# Altium PCB PCBStudy(LEDLight).PcbDoc
Units mil, origin at the board's own origin, x right, y up, seen from the top; angles counter-clockwise.
Board outline 1400 x 700 mil, 2 copper layers (Top Layer, Bottom Layer); 7 components, 6 nets, 16 pads, 0 vias.
Unrouted connection lines stored in the file: 9.
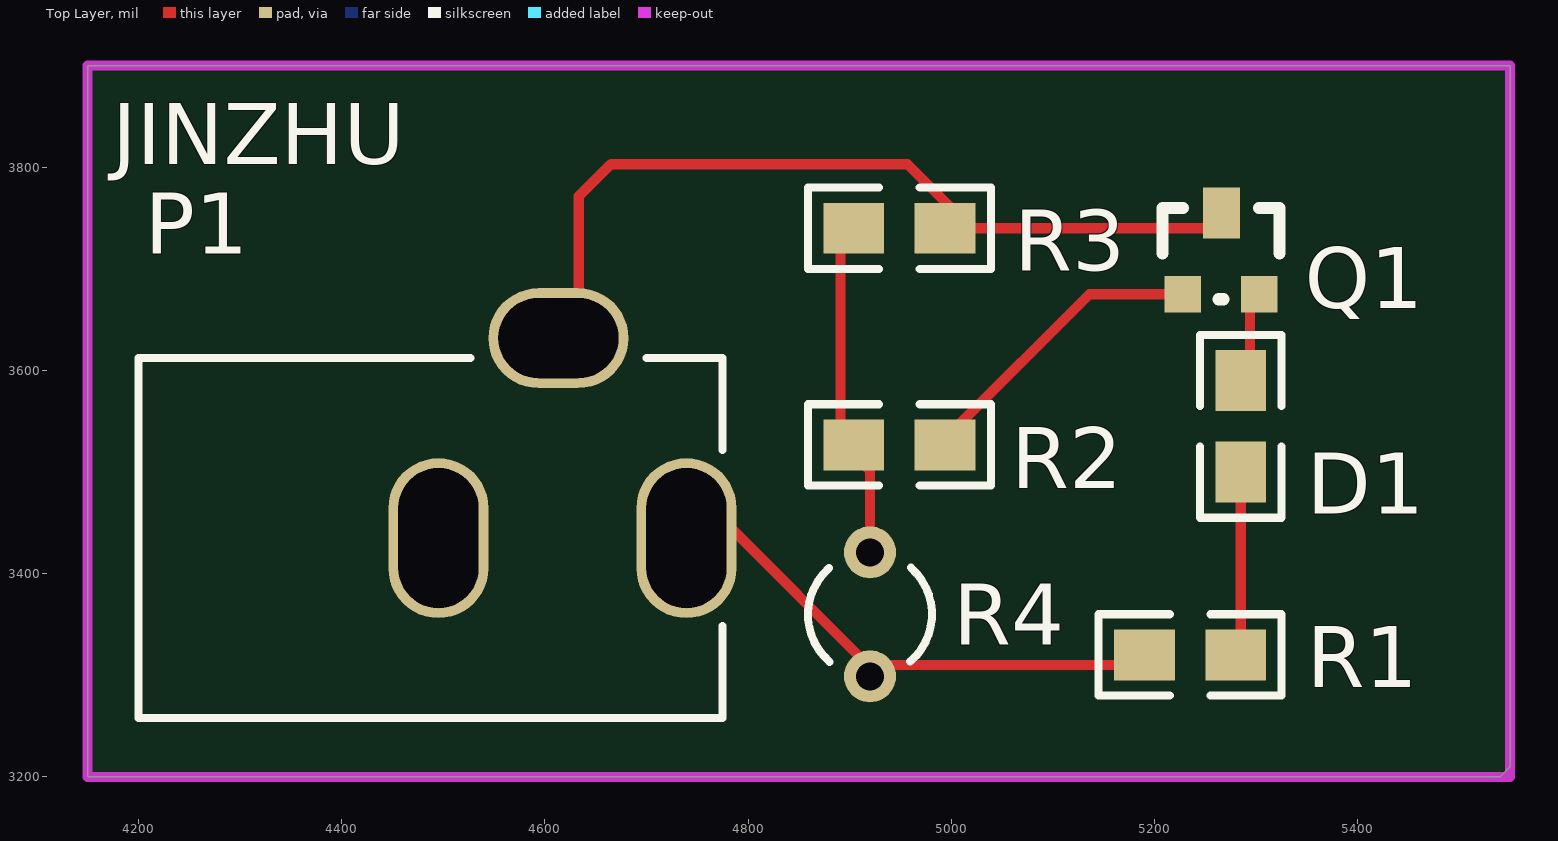
[diagram p0: Top Layer view]
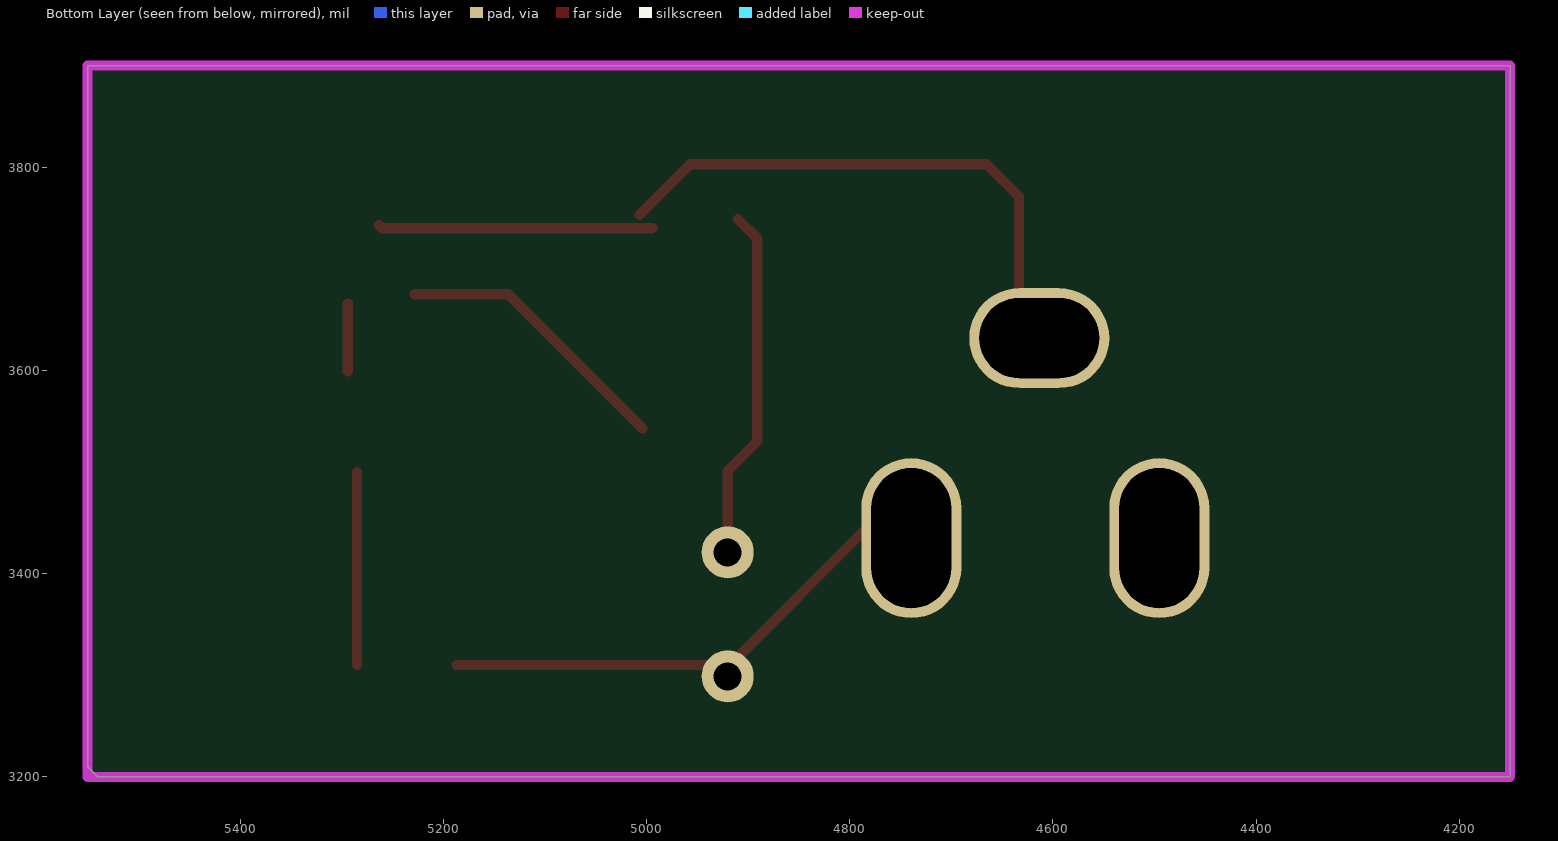
[diagram p1: Bottom Layer view, seen from below]

## Layer stack, top to bottom
Top Layer: signal copper 1.4
Dielectric: dielectric 12.6, FR-4, Dk 4.8
Bottom Layer: signal copper 1.4

## Board outline
4150,3900 4150,3200 5540,3200 5550,3210 5550,3900

## Design rules (kind name [scope] priority, off if disabled: settings)
Clearance [All] p1: gap=10
PolygonConnect [All] p1: connectstyle=Relief reliefconductorwidth=10 reliefentries=4 polygonreliefangle="90 Angle"
RoutingVias [All] p1: holewidth=28 width=50 viastyle="Through Hole" minholewidth=28 minwidth=50 maxholewidth=28 maxwidth=50
SilkscreenOverComponentPads [All] p1: minsilkscreentomaskgap=10
SolderMaskExpansion [All] p1: expansion=4
TestPointUsage [All] p1: valid=0 allowmultiple=FALSE
Testpoint [All] p1: side=15 testpointundercomponent=TRUE minsize=40 maxsize=100 preferedsize=60 minholesize=0 maxholesize=40 preferedholesize=32 testpointgrid=1 style=1023 order=0-112345678
Width [All] p1: maxlimit=10 minlimit=10 preferedwidth=10
23 further rules are at their usual default settings.

## Components (designator, comment, footprint, x,y, rotation, side; value= is the part's Value field where it differs from the comment)
D1 "LED0" 0805 5285,3500 r90 top
P1 "DC2.1" DC2.1 4740,3440 r90 top
Q1 "8550" SOT-23 5268,3755 r0 top
R1 "Res2" 0805 5280,3320 r180 top
R2 "Res2" 0805 4904.04,3526.69 r0 top
R3 "Res2" 0805 4994.04,3740 r180 top
R4 "5547" 5547 4920,3360 r0 top

## Footprints (in the part's own frame and the unit in brackets; to place one, negate y for a bottom-side part, rotate by r counter-clockwise, add the part's x,y. Pads: shape width x height; smd on the part's side, far side on the other; paste and mask are expansions set on the pad)
0805 [mil]
  rect 60x50 smd: 1(0,0) 2(90,0)
  silkscreen extent -45,-40 135,40
5547 [mm] "光敏电阻5547"
  round 1.3 hole 0.7: 1(0,1.55) 2(0,-1.55)
  silkscreen extent -1.55,-1.19 1.55,1.17
DC2.1 [mm]
  oval 4x2.5 hole 2 slot 3.5 at 0 deg: 1(-0.127,0.016) 2(-0.127,6.216)
  oval 2.5x3.5 hole 2 slot 3 at 90 deg: 3(4.873,3.216)
  silkscreen extent -4.63,-0.88 4.37,13.72
SOT-23 [mil]
  rect 36x50 smd: 1(-2,0)
  rect 36x36 smd: 2(-40,-80) 3(35,-80)
  silkscreen extent -60,-85 55,5

## Part data
D1: "Typical INFRARED GaAs LED"
P1: library part "Header 3", "Header, 3-Pin"
Q1: library part PNP, "PNP Bipolar Transistor"
R1 R2 R3: "Resistor"
R4: library part Res2, "Resistor"

## Nets (pads, with @x,y where several pads share a name; then routed paths per layer and width w, separated by ;. In a path a pad name is that pad's centre, name@x,y a point inside that pad or via, vN(x,y) a via of type N, cw(c..) or ccw(c..) an arc to the next point about the centre after c; other vN are vias at no path point)
NetD1_1: D1.1 R1.1
NetD1_2: D1.2 Q1.3
NetP1_1: P1.1 R1.2 R4.2
NetP1_3: P1.3 Q1.1 R3.1
NetQ1_2: Q1.2 R2.2
NetR2_1: R2.1 R3.2 R4.1
pads on no net: P1.2
copper on no net: | length 2175.9
  Top Layer w10: 4633.39,3631.85 4633.39,3771.39 4665,3803 4957,3803 5007,3753 ; 4756,3448 4780,3448 4918,3310 ; 4910,3749 4891,3730 4891,3530 4920,3501 4920,3421.02 ; 4931,3310 5187,3310 ; 4994.04,3740 5260,3740 5263,3743 ; 5004,3543 5136,3675 5228,3675 ; 5285,3310 5285,3500 ; 5294,3599 5294,3666

## Keep-outs
Keep-Out Layer:
  lines w10: 4150,3200 5550,3200 5550,3900 4150,3900 4150,3200

## Silkscreen, mask and mechanical layers (free items; w line width, h text height)
Top Overlay:
  text "JINZHU" at 4174,3803 h60